# Altium PCB USB-NSTr_v3.PcbDoc
Units mm, origin at the board's own origin, x right, y up, seen from the top; angles counter-clockwise.
Board outline 25 x 48 mm, 2 copper layers (Top Layer, Bottom Layer), stack 1.671 mm thick; 11 components, 51 nets, 31 pads, 6 vias.
Unrouted connection lines stored in the file: 6.
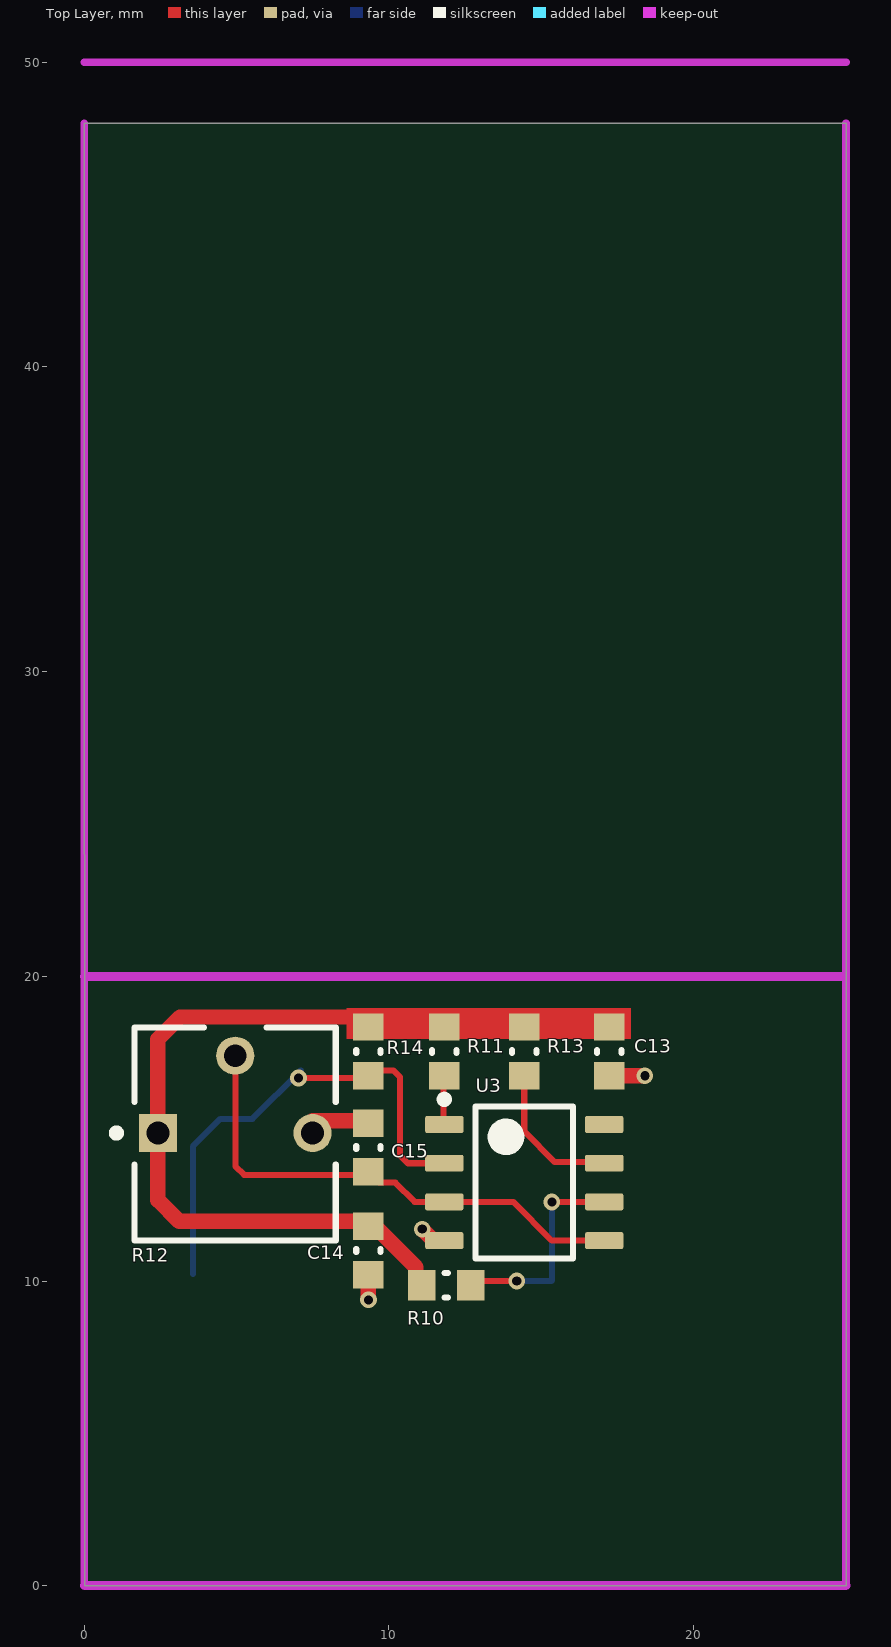
[diagram p0: Top Layer view]
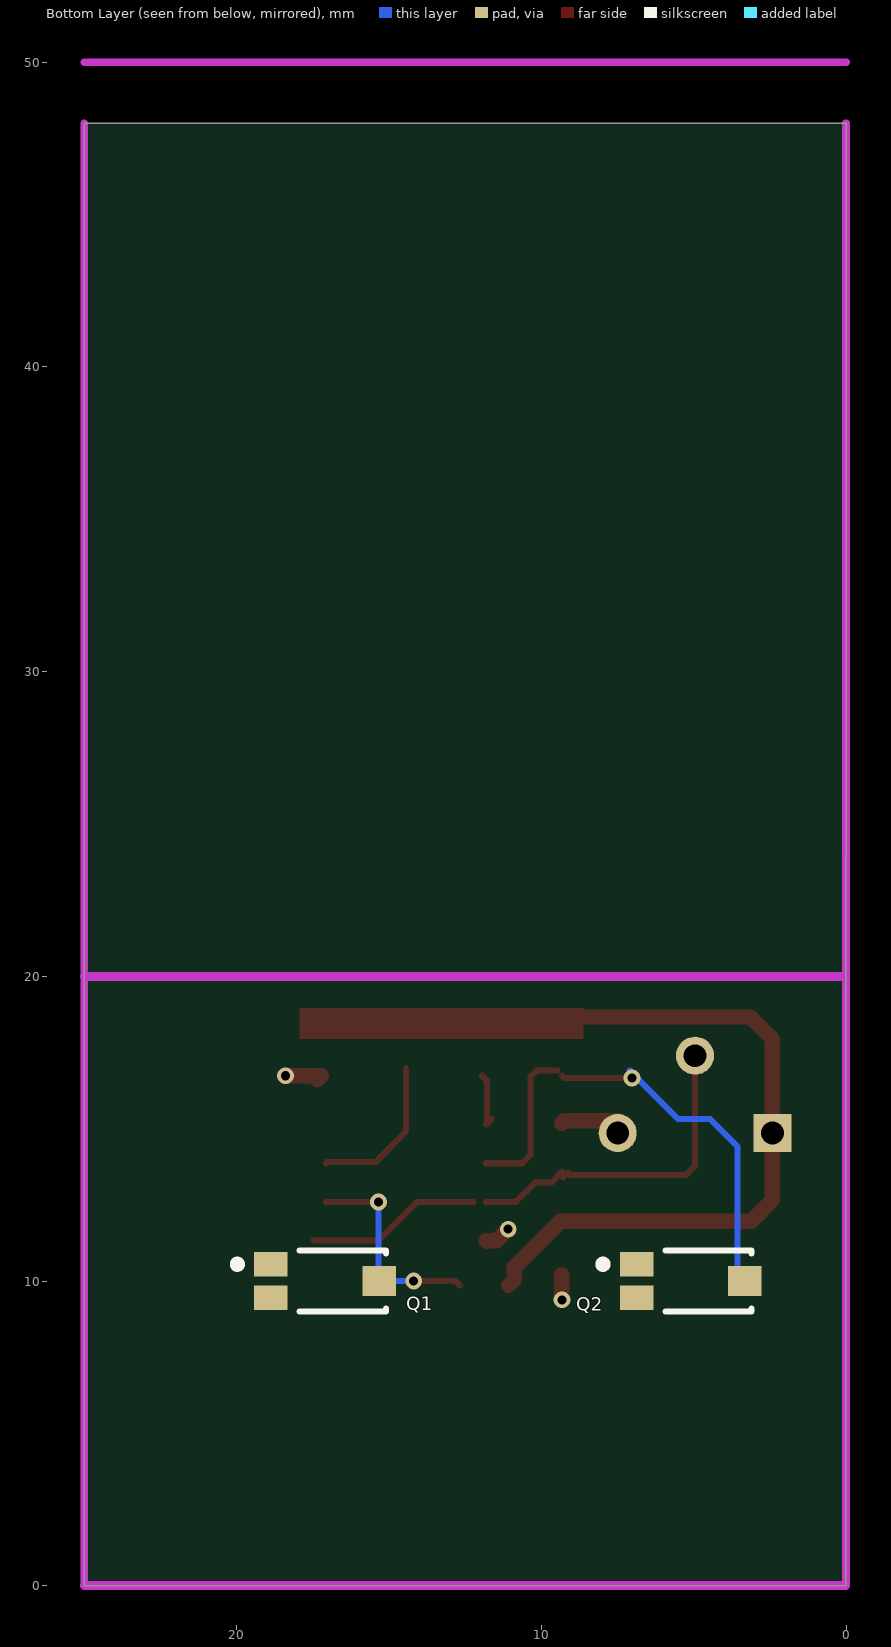
[diagram p1: Bottom Layer view, seen from below]

## Layer stack, top to bottom
Top Solder: solder mask 0.0102, Solder Resist, Dk 3.5
Top Layer: signal copper 0.0356
Dielectric1: core 1.6, FR-4, Dk 4.8
Bottom Layer: signal copper 0.0356
Bottom Solder: solder mask 0.0102, Solder Resist, Dk 3.5

## Board outline
0.015,0 25,0 25,48 0,48

## Design rules (kind name [scope] priority, off if disabled: settings)
Clearance Clearance_1 [InPolygon] p1: gap=0.356 ignorepadtopadclearanceinfootprint=FALSE except(0: Arc-Hole Track-Hole SMDPad-Hole THPad-Hole Via-Hole Fill-Hole Poly-Hole Region-Hole Text-Hole)
Clearance [All] p2: gap=0.152 ignorepadtopadclearanceinfootprint=FALSE except(0: Arc-Hole Track-Hole SMDPad-Hole THPad-Hole Via-Hole Fill-Hole Poly-Hole Region-Hole Text-Hole)
FabricationTestPointUsage TestPointUsage [All] p1: valid=0 allowmultiple=FALSE
FabricationTestpoint Testpoint [(IsPad And (OnTopLayer Or OnBottomLayer))] p1: side=3 testpointundercomponent=TRUE minsize=1.016 maxsize=2.54 preferedsize=1.524 minholesize=0 maxholesize=1.016 preferedholesize=0.813 testpointgrid=0.025 allowsidetop=TRUE allowsidebottom=TRUE usegrid=TRUE gridtolerance=0
HoleSize [All] p1: absolutevalues=TRUE maxlimit=20 minlimit=0.3 maxpercent=80.000 minpercent=20.000
HoleToHoleClearance [All] p1: gap=0 allowstackedmicrovias=TRUE
MinimumSolderMaskSliver [All] p1: minsoldermaskwidth=0
PlaneClearance [All] p1: clearance=0.4
PlaneConnect [All] p1: planeconnectstyle=Direct reliefexpansion=0.3 reliefentries=4 reliefconductorwidth=0.3 reliefairgap=0.3
PolygonConnect [All] p1: connectstyle=Relief reliefconductorwidth=0.3 reliefentries=4 polygonreliefangle="90 Angle" airgapwidth=0.3
RoutingVias [All] p1: holewidth=0.5 width=1.3 viastyle="Through Hole" minholewidth=0.3 minwidth=0.5 maxholewidth=10 maxwidth=20
SilkToSilkClearance [All] p1: silktosilkclearance=0
SilkToSolderMaskClearance SilkscreenOverComponentPads [IsPad] p1: minsilkscreentomaskgap=0 clearancetoexposedcopper=TRUE
SolderMaskExpansion [All] p1: expansion=0.102 istentingtop=FALSE
Width [All] p1: maxlimit=5.08 minlimit=0.152 preferedwidth=0.254
21 further rules are at their usual default settings.

## Classes and differential pairs
component class USB-NSTr_v3: L1 L2

## Components (designator, comment, footprint, x,y, rotation, side; value= is the part's Value field where it differs from the comment)
C13 "CAP 100nF 6.3V" CAPC0603(1608)100_N 17.228,17.536 r90 top value=100nF
C14 "CAP 100nF 6.3V" CAPC0603(1608)100_N 9.324,11 r90 top value=100nF
C15 "CAP 100nF 6.3V" CAPC0603(1608)100_N 9.324,14.381 r270 top value=100nF
Q1 "TEMT6000X01" VSIL-TEMT6000X01_V 17.101,10 r180 bottom
Q2 "TEMT6000X01" VSIL-TEMT6000X01_V 5.101,10 r180 bottom
R10 "10K 1% 0603(1608)" RESC0603(1608)_N 11.878,9.856 r180 top value="10000.00 Ohm"
R11 "1K 1% 0603(1608)" RESC0603(1608)_N 11.814,17.536 r90 top value="3300.00 Ohm"
R12 "RPot" BOUR-3362P 4.953,14.821 r0 top
R13 "3K3 1% 0603(1608)" RESC0603(1608)_N 14.439,17.536 r90 top value="3300.00 Ohm"
R14 "10K 1% 0603(1608)" RESC0603(1608)_N 9.324,17.536 r90 top value="10000.00 Ohm"
U3 "LM393M" D0008A_L 14.439,13.232 r0 top

## Footprints (in the part's own frame and the unit in brackets; to place one, negate y for a bottom-side part, rotate by r counter-clockwise, add the part's x,y. Pads: shape width x height; smd on the part's side, far side on the other; paste and mask are expansions set on the pad)
BOUR-3362P [mm] "THD, 3-Leads, Body 6.6x6.99mm, Pitch 2.54mm"
  rect 1.25x1.25 hole 0.75: 1(-2.54,0.035)
  round 1.25 hole 0.75: 2(0,2.575) 3(2.54,0.035)
  silkscreen extent -4.02,-3.49 3.3,3.5, body extent -3.3,-3.49 3.3,3.49, height 4.95
CAPC0603(1608)100_N [mm] "Chip Capacitor, Body 1.6x0.8mm, Height 1.0mm, IPC Medium Density"
  rect 0.9x1 smd: 1(-0.8,0) 2(0.8,0)
  silkscreen extent -0.05,-0.4 0.05,0.4, body extent -0.87,-0.48 0.88,0.47, height 1
D0008A_L [mm] "SOIC, 8-Leads, Body 5x4mm, Pitch 1.27mm, IPC High Density"
  rrect18% 1.25x0.55 smd: 1(-2.625,1.905) 2(-2.625,0.635) 3(-2.625,-0.635) 4(-2.625,-1.905) 5(2.625,-1.905) 6(2.625,-0.635) 7(2.625,0.635) 8(2.625,1.905)
  silkscreen extent -2.75,-2.5 1.6,2.85, body extent -3,-2.45 3,2.45, height 1.63
RESC0603(1608)_N [mm] "Chip Resistor, Body 1.6x0.8mm, IPC Medium Density"
  rect 0.9x1 smd: 1(-0.8,0) 2(0.8,0)
  silkscreen extent -0.05,-0.4 0.05,0.4, body extent -0.85,-0.47 0.85,0.47, height 0.6
VSIL-TEMT6000X01_V [mm] "SMD, 3-Leads, Body 4x2mm"
  rect 1.1x0.8 smd: 1(-1.775,0.55) 2(-1.775,-0.55)
  rect 1.1x1 smd: 3(1.775,0)
  silkscreen extent -3,-1 2,1, body extent -2,-1 2,1, height 1.05

## Part data
C13 C14 C15: library part CMP-1035-02576-1, "CAP 100nF 6.3V ±10% 0603 (1608 Metric) Thickness 1mm SMD", Case-EIA=0603, Case-Metric=1608, Rated Voltage="6.3 V", Tolerance=Â±10%, Max Thickness="1 mm", Technology=SMT
Q1: library part CMP-1666-00035-1, "Ambient Light Sensor / , 100 mW, -40 to 100 degC, 3-Pin SMD, RoHS, Tape and Reel", Case\Package=0603, Case Code (Metric)=1608, Colour=Red, Forward Current="20 mA", Forward Voltage="2 V", Max Operating Temperature="85 degC", Min Operating Temperature="-55 degC", Package Quantity=3000, Power Rating="75 mW", Case Code (Imperial)=0603, ComponentLink1Description="Manufacturer URL", ComponentLink1URL=http://www.vishay.com/, ComponentLink2Description=Datasheet, ComponentLink2URL=http://www.vishay.com/docs/81579/temt6000.pdf, DatasheetVersion="Rev. 1.9, 08/2011", Height="0.8 mm", Illumination Colour=Red, Length="1.6 mm", Lens Style=Diffused, Luminous Intensity="54 mcd", Mount="Surface Mount", Nominal Vf="2 V", PackageDescription="3-Pin Surface Mount Device, Body 4 x 2 mm", PackageReference=1206, Packaging="Tape and Reel", Pins=2, Radiation Hardening=No, RoHSCompliant=true, Viewing Angle="130 degrees", Width="0.8 mm"
Q2: library part CMP-1666-00035-1, "Ambient Light Sensor / , 100 mW, -40 to 100 degC, 3-Pin SMD, RoHS, Tape and Reel", Case Code (Imperial)=0603, Case Code (Metric)=1608, Colour=Red, Forward Current="20 mA", Forward Voltage="2 V", Max Operating Temperature="85 degC", Min Operating Temperature="-55 degC", Package Quantity=3000, Power Rating="75 mW", Case\Package=0603, ComponentLink1Description="Manufacturer URL", ComponentLink1URL=http://www.vishay.com/, ComponentLink2Description=Datasheet, ComponentLink2URL=http://www.vishay.com/docs/81579/temt6000.pdf, DatasheetVersion="Rev. 1.9, 08/2011", Height="0.8 mm", Illumination Colour=Red, Length="1.6 mm", Lens Style=Diffused, Luminous Intensity="54 mcd", Mount="Surface Mount", Nominal Vf="2 V", PackageDescription="3-Pin Surface Mount Device, Body 4 x 2 mm", PackageReference=1206, Packaging="Tape and Reel", Pins=2, Radiation Hardening=No, RoHSCompliant=true, Viewing Angle="130 degrees", Width="0.8 mm"
R10 R14: library part CMP-1012-00623-1, "10K 0.1W 1% 0603 (1608 Metric)  SMD", Case-EIA=0603, Case-Metric=1608, Power="0.1 W", Tolerance="1 %", Technology=SMT
R11 R13: library part CMP-1012-00567-1, "3K3 0.1W 1% 0603 (1608 Metric)  SMD", Case-EIA=0603, Case-Metric=1608, Power="0.1 W", Tolerance="1 %", Technology=SMT
R12: "Potentiometer", LatestRevisionDate=17-Jul-2002, LatestRevisionNote="Re-released for DXP Platform.", PackageDescription="Variable Resistor, Thru-Hole; 3 Leads", PackageReference=VR5, Published=8-Jun-2000, Publisher="Altium Limited", Set Position=0.5, Sim Note="Enter the Resistance value and the set point into parameter fields."
U3: library part CMP-0055-00682-3, "Low Power Low Offset Voltage Dual Comparator, 8-pin Narrow SOIC", Manufacturer="Texas Instruments", Package Reference=D0008A, PackageTopMarking=NSZXTT*LM*393M, PowerWise=N, Code_IPC=SOIC127P600-8, Code_JEDEC=MS-012-AA, ComponentLink1Description="Datasheet URL", ComponentLink1URL=http://www.ti.com/general/docs/lit/getliterature.tsp?genericPartNumber=LM393-N&fileType=pdf, CompType=Amplifiers, PackageDescription="SOIC Narrow, 4.9 x 3.9 x 1.45mm, 8 Lead, 1.27mm Pitch", PinCount=8, RoHS=N

## Via types
v1: diameter 0.55, hole 0.3, Top Layer to Bottom Layer, tented both sides, 6 vias

## Nets (pads, with @x,y where several pads share a name; then routed paths per layer and width w, separated by ;. In a path a pad name is that pad's centre, name@x,y a point inside that pad or via, vN(x,y) a via of type N, cw(c..) or ccw(c..) an arc to the next point about the centre after c; other vN are vias at no path point)
3.3VD: 
+5: C13.2 C14.2 R10.2 R11.2 R12.1 R13.2 R14.2 U3.8 | length 22.6
  Top Layer w0.508: R14.2@9.394,18.665 3.14,18.665 2.413,17.938 R12.1 2.413,12.655 3.108,11.96 9.324,11.96 9.374,11.96 10.882,10.452 10.882,10.052 R10.2
D+: 
D-: 
GND: C13.1 C14.1 C15.1 Q1.1 Q2.1 R12.3 U3.4 | length 4.9
  Top Layer w0.508: R12.3@7.493,15.256 9.249,15.256 C15.1 ; v1(9.324,9.381) C14.1 ; v1(11.089,11.702) 11.464,11.327 U3.4 U3.4@11.793,11.306 ; C13.1@17.356,16.609 C13.1 v1(18.398,16.736)
MCU_BOOT0: 
MCU_nRESET: 
MCU_SWDCK: 
MCU_SWDIO: 
NetC1_1: 
NetC2_1: 
NetC10_2: 
NetC12_1: 
NetC12_2: 
NetC15_2: C15.2 R12.2 U3.3 U3.5 | length 16.8
  Top Layer w0.203: R12.2 4.958,17.39 4.958,13.769 5.246,13.481 9.053,13.481 9.128,13.556 C15.2@9.281,13.403 ; C15.2 9.672,13.232 10.205,13.232 10.84,12.597 U3.3 ; U3.3@12.233,12.597 14.075,12.597 15.345,11.327 U3.5@17.483,11.327
NetD1_1: 
NetD1_3: 
NetFB3_2: 
NetFB4_2: 
NetP2_2: 
NetP6_2: R11.1 U3.1 | length 1.8
  Top Layer w0.203: U3.1@11.641,15.311 11.746,15.205 U3.1 ; U3.1@11.787,15.246 11.787,16.571 R11.1@11.953,16.736
NetP6_3: R13.1 U3.7 | length 5.1
  Top Layer w0.203: R13.1@14.439,16.98 14.439,14.909 15.443,13.906 17.026,13.906 U3.7
NetQ1_3: Q1.3 R10.1 U3.6 | length 7.2
  Top Layer w0.203: R10.1 12.822,10 v1(14.191,10) ; v1(15.345,12.597) U3.6
  Bottom Layer w0.203: v1(14.191,10) Q1.3 15.345,10.02 v1@15.345,12.753
NetQ2_3: Q2.3 R14.1 U3.2 | length 16.2
  Top Layer w0.203: v1(7.026,16.661) 9.249,16.661 R14.1 ; R14.1@9.474,16.905 10.149,16.905 10.358,16.696 10.358,14.131 10.621,13.867 U3.2
  Bottom Layer w0.203: Q2.3@3.564,10.239 3.564,14.416 4.469,15.32 5.516,15.32 v1@7.101,16.905
Rp0: 
Rp1: 
Rp2: 
Rp3: 
Rp4: 
Rp5: 
Rp6: 
Rp7: 
StatusLED_1: 
StatusLED_2: 
TB0: 
TB1: 
TB2: 
TB3: 
TB4: 
TB5: 
TB6: 
TB7: 
TIM1_CH1: 
TIM1_CH2: 
USART1_RX: 
USART1_TX: 
USART3_RX: 
USART3_TX: 
USB_DM: 
USB_DP: 
VBUS: 
pads on no net: Q1.2 Q2.2

## Polygon pours and split planes (outlines as drawn)
no net on Top Layer "Top Layer-No Net" (solid, pour order 0): 13.822,-22.517

## Keep-outs
Keep-Out Layer:
  lines w0.254: 0,0 0,48 ; 0,50 25,50 ; 25,0 25,48
  lines w0.3: 0.011,20 24.987,20 ; 0.015,0 24.99,0

## Other copper
Top Layer:
  rectangle net +5: 8.612,17.938 17.941,18.963